# Allegro board PROIECT_TIE.brd
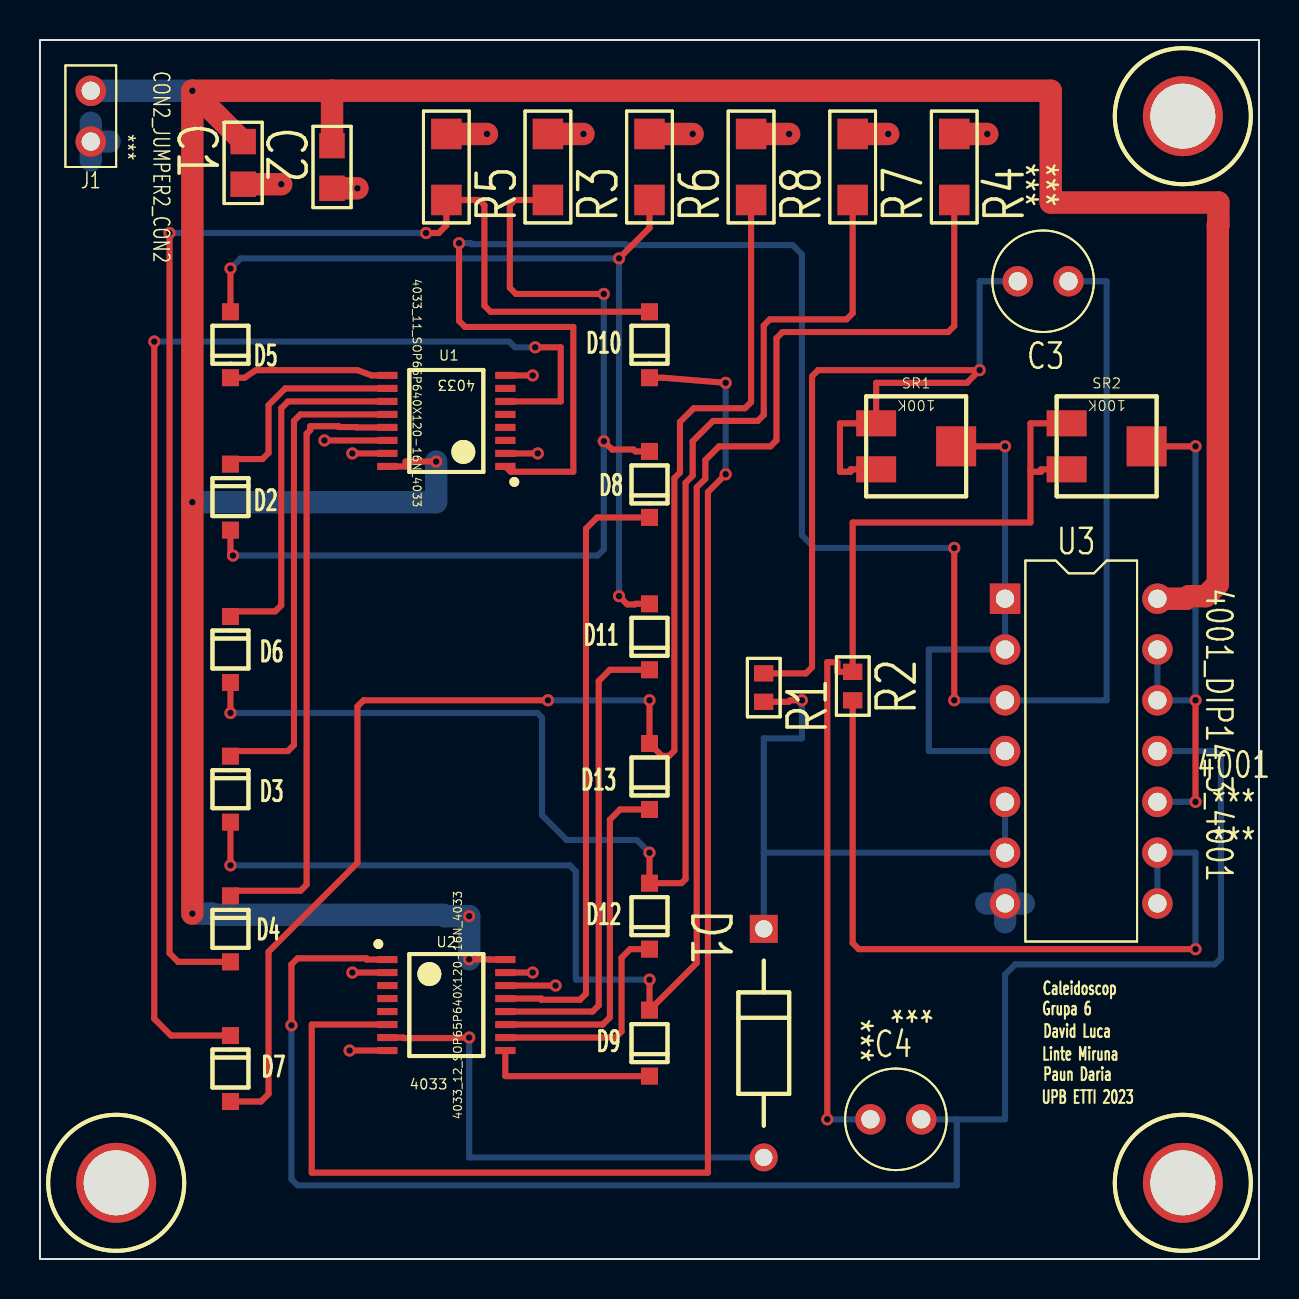
[diagram p0: board, top side]
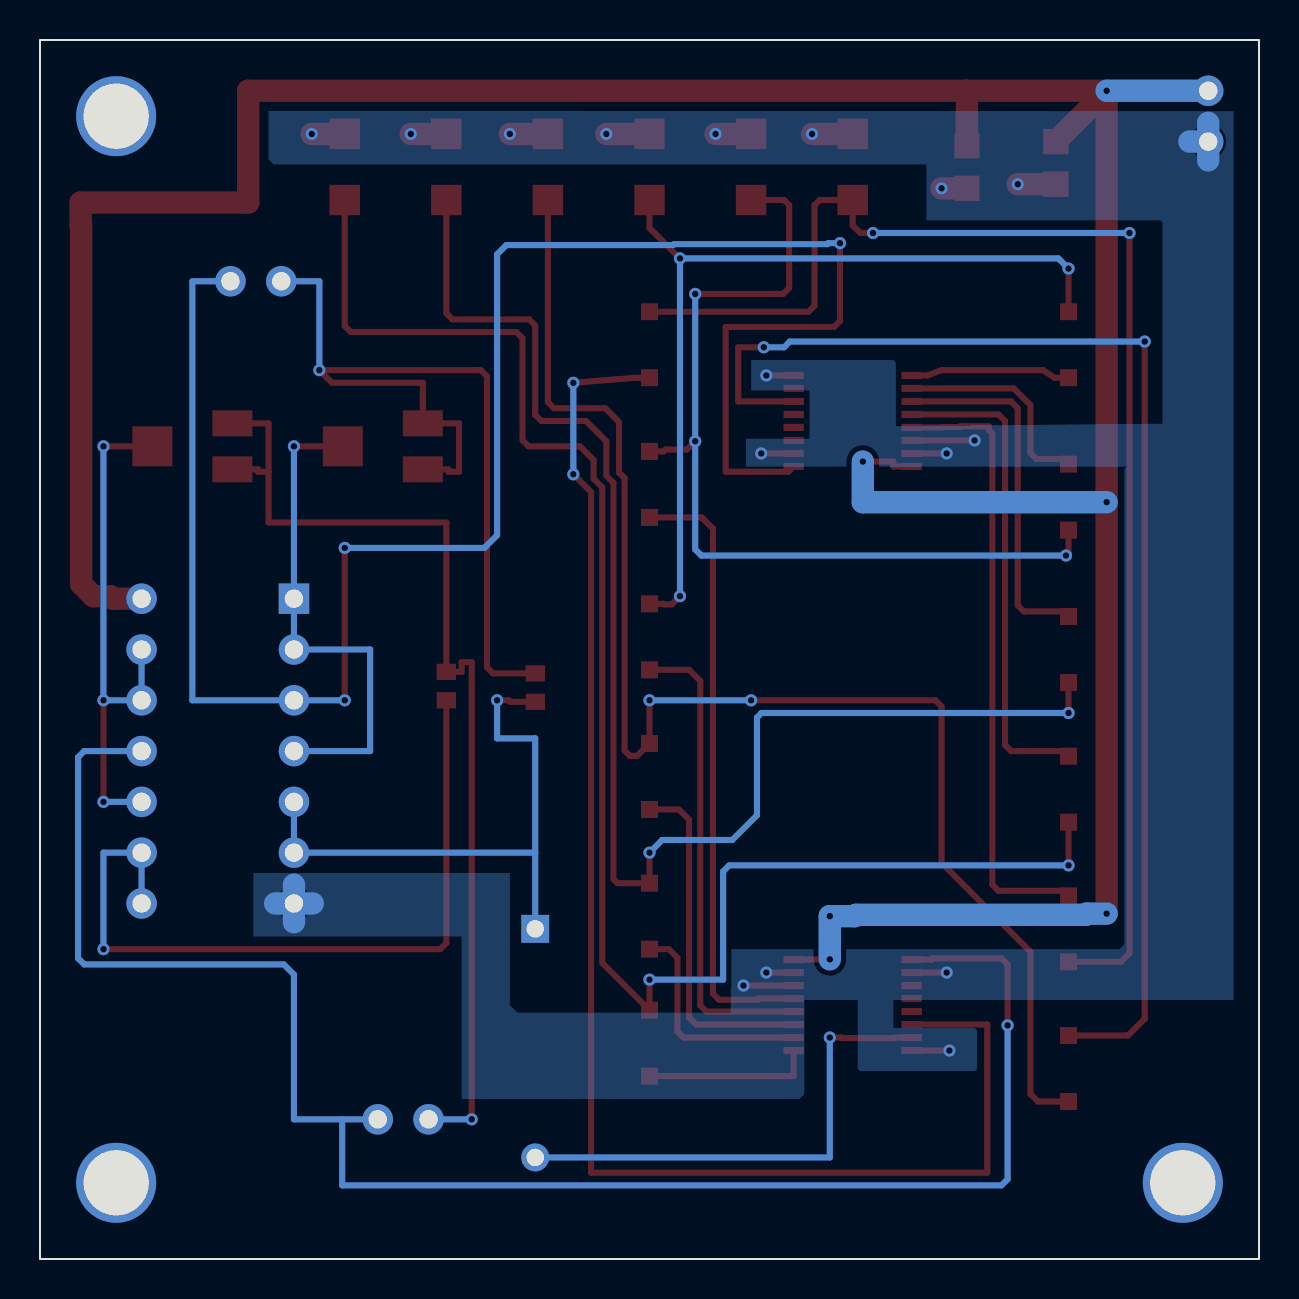
[diagram p1: board, bottom side, seen from below]

Outline 60.96 x 60.96 mm; copper layers: TOP, BOTTOM. Coordinates in mm from the lower left corner of the outline.
Outline path: rectangle 0,0 60.96,60.96

## Design rules (mm)
nets with their own width: min track width 0.305; nets N01018 N01147 N01271 N02659 N02668 N02718 N03305 N03321 N03325 N03329 N03609 N04193 N05010 N05022 N05963 N05969 N05975 N05981 N05987 N05999 N07239 N07243 N07258 N07262 N07266 N07270 N30968
nets with their own width: min track width 1.118; nets GND VDD

## Placement (name value [footprint] x y rotation side)
C1  4n7  [SMC0805]  10.16 55.88 270 top
C2  4n7  [SMC0805]  14.61 55.68 270 top
C3  1u  [CAP196]  48.9 48.9 270 top
C4  1u  [CAP196]  41.53 6.99 270 top
D1  D1N4148  [DAX2DO35]  36.2 5.08 270 top
D2  LED  [SOD123]  9.53 38.05 270 top
D3  LED  [SOD123]  9.53 23.44 270 top
D4  LED  [SOD123]  9.53 16.46 270 top
D5  LED  [SOD123]  9.53 45.77 90 top
D6  LED  [SOD123]  9.53 30.43 270 top
D7  LED  [SOD123]  9.53 9.47 270 top
D8  LED  [SOD123]  30.48 38.79 90 top
D9  LED  [SOD123]  30.48 10.85 90 top
D10  LED  [SOD123]  30.48 45.77 90 top
D11  LED  [SOD123]  30.48 31.17 90 top
D12  LED  [SOD123]  30.48 17.2 90 top
D13  LED  [SOD123]  30.48 24.18 90 top
J1  CON2  [JUMPER2]  2.54 58.42 270 top
NOREF  -  [unnamed]  3.81 3.81 0 top
NOREF#2  -  [unnamed]  57.15 57.15 0 top
NOREF#3  -  [#2]  0 0 90 top
NOREF#4  -  [#2]  0 0 0 top
NOREF#5  -  [unnamed]  57.15 3.81 0 top
R1  33K  [SMR0603]  36.19 27.86 90 top
R2  33K  [SMR0603]  40.64 27.94 90 top
R3  150  [SMR1206]  25.4 52.96 90 top
R4  150  [SMR1206]  45.72 52.96 90 top
R5  150  [SMR1206]  20.32 52.96 90 top
R6  150  [SMR1206]  30.48 52.96 90 top
R7  150  [SMR1206]  40.64 52.96 90 top
R8  150  [SMR1206]  35.56 52.96 90 top
SR1  100K  [TRIM_BI_23AM]  43.81 40.64 180 top
SR2  100K  [TRIM_BI_23AM]  53.34 40.64 180 top
U1  4033  [SOP65P640X120-16N]  20.32 41.91 180 top
U2  4033  [SOP65P640X120-16N]  20.32 12.7 0 top
U3  4001  [DIP14_3]  48.26 33.02 0 top

## Library data of the parts
C1 C2 = CAP NP
C3 C4 = CAP POL: Tolerance: ***; User Part Number: ***
D1 = D1N4148
D2-D13 = LED
J1 = CON2: User Part Number: ***
R1-R8 = R
SR1 SR2 = POT
U1 = 4033_11
U2 = 4033_12
U3 = 4001: Tolerance: ***; User Part Number: ***

## Footprints (pads in the part's own frame, mm; a bottom-side part is the same pattern mirrored in y, then rotated)
CAP196
  round 1.524 hole 0.914: 1(0,0) 2(0,2.54)
DAX2DO35
  round 1.397 hole 0.864: 1(0,0)
  rect 1.397x1.397 hole 0.864: 2(-11.43,0)
DIP14_3
  rect 1.524x1.524 hole 0.914: 1(0,0)
  round 1.524 hole 0.914: 2(0,-2.54) 3(0,-5.08) 4(0,-7.62) 5(0,-10.16) 6(0,-12.7) 7(0,-15.24) 8(7.62,-15.24) 9(7.62,-12.7) 10(7.62,-10.16) 11(7.62,-7.62) 12(7.62,-5.08) 13(7.62,-2.54) 14(7.62,0)
JUMPER2
  round 1.524 hole 0.914: 1(0,0) 2(2.54,0)
SMC0805
  rect 1.27x1.27 smd: 1(0,0) 2(2.134,0)
SMR0603
  rect 0.813x0.965 smd: 1(0,0) 2(1.422,0)
SMR1206
  rect 1.524x1.524 smd: 1(0,0) 2(3.302,0)
SOD123
  rect 0.85x0.85 smd: 1(-1.7,0) 2(1.6,0)
SOP65P640X120-16N
  rect 1.016x0.356 smd: 1(-2.95,2.275) 2(-2.95,1.625) 3(-2.95,0.975) 4(-2.95,0.325) 5(-2.95,-0.325) 6(-2.95,-0.975) 7(-2.95,-1.625) 8(-2.95,-2.275) 9(2.95,-2.275) 10(2.95,-1.625) 11(2.95,-0.975) 12(2.95,-0.325) 13(2.95,0.325) 14(2.95,0.975) 15(2.95,1.625) 16(2.95,2.275)
TRIM_BI_23AM
  rect 2x1.3 smd: 1(2,1.15) 2(2,-1.15)
  rect 2x2 smd: 3(-2,0)
unnamed
  round 4 hole 3.251 unplated: (0,0)

## Nets
GND: C1.2 C2.2 J1.2 R3.2 R4.2 R5.2 R6.2 R7.2 R8.2 U1.2 U1.8 U1.14 U1.15 U2.2 U2.8 U2.14 U2.15 U3.7
VDD: C1.1 C2.1 J1.1 U1.16(VDD) U2.16(VDD) U3.14
N01018: C3.2 U1.1 U3.3
N01147: C3.1 R1.2 SR1.1 SR1.2(WIPER)
N01271: D1.2 R1.1 U3.5 U3.6
N02659: R2.1 U3.8 U3.9
N02668: C4.1 R2.2 SR2.1 SR2.2(WIPER)
N02718: C4.2 U2.1 U3.11(OUT)
N03305: D2.1 U1.10
N03321: D4.1 U1.13
N03325: D7.1 U1.6
N03329: D8.1 U2.13
N03609: D6.1 U1.11
N04193: SR1.3 U3.1 U3.2 U3.4
N05010: D5.1 U1.9
N05022: D3.1 U1.12
N05963: D9.1 U2.9
N05969: D10.1 U2.6
N05975: D11.1 U2.12
N05981: D12.1 U2.10
N05987: D13.1 U2.11
N05999: D1.1 U2.7
N07239: D2.2(CATHODE) D8.2(CATHODE) R3.1
N07243: D3.2(CATHODE) D9.2(CATHODE) R4.1
N07258: D4.2(CATHODE) D10.2(CATHODE) R5.1
N07262: D5.2(CATHODE) D11.2(CATHODE) R6.1
N07266: D6.2(CATHODE) D12.2(CATHODE) R7.1
N07270: D7.2(CATHODE) D13.2(CATHODE) R8.1
N30968: SR2.3 U3.10 U3.12 U3.13

Pads without a net: U1 3 4 5 7; U2 3 4 5

## Via types
v1: diameter 0.61, hole 0.33, TOP to BOTTOM, 53 vias

## Routing (per net, layer and track width the routed paths; a pad name or vN(x,y) marks a point on that pad's centre or on a via; arc(x,y) is an arc through that point)
GND: length 36.5
  TOP w0.305: U1.2 v1(24.89,40.28) ; U2.8 v1(15.48,10.42) ; U1.8 v1(24.64,44.19) ; U2.14 v1(25.78,13.68) ; U1.15 v1(15.62,40.28) ; U2.2 v1(15.62,14.33) ; U1.14 v1(14.22,40.93) ; U2.15 v1(24.64,14.33)
  TOP w1.118: R6.2 v1(32.64,56.26) ; R7.2 v1(42.42,56.26) ; R8.2 v1(37.47,56.26) ; R3.2 v1(27.18,56.26) ; R5.2 v1(22.35,56.26) ; R4.2 v1(47.37,56.26) ; C2.2 v1(15.88,53.54) ; C1.2 v1(12.06,53.75)
  BOTTOM w1.118: 47.32,17.78 U3.7 ; U3.7 49.2,17.78 ; U3.7 48.26,16.84 ; U3.7 48.26,18.72 ; 2.54,54.94 J1.2 ; J1.2 3.48,55.88 ; J1.2 2.54,56.82
VDD: length 166.7
  TOP w0.305: U1.16 18.28,39.63 18.28,39.88 v1(19.81,39.88) ; U2.16 22.48,14.98 22.48,14.99 v1(21.46,14.99)
  TOP w1.118: v1(7.62,58.42) 14.61,58.42 ; v1(7.62,58.42) v1(7.62,37.85) v1(7.62,17.27) ; v1(7.62,58.42) C1.1 ; 14.61,58.42 50.55,58.42 50.55,52.83 58.93,52.83 58.93,51.71 58.9,51.71 58.9,33.76 58.29,33.15 57.45,33.15 57.33,33.02 U3.14 ; 14.61,58.42 C2.1
  BOTTOM w1.118: v1(21.46,14.99) v1(21.46,17.14) 20.22,17.14 20.15,17.21 8.67,17.21 8.61,17.27 v1(7.62,17.27) ; v1(19.81,39.88) 19.81,37.85 v1(7.62,37.85) ; J1.1 v1(7.62,58.42)
N01018: length 97.9
  TOP w0.305: v1(20.95,50.8) 20.95,46.91 21.26,46.61 26.67,46.61 26.67,39.37 23.53,39.37 U1.1 ; v1(45.72,27.94) v1(45.72,35.56)
  BOTTOM w0.305: v1(45.72,35.56) 38.73,35.56 38.1,36.2 38.1,50.24 37.64,50.71 29.29,50.71 29.25,50.75 21.59,50.75 21.54,50.8 v1(20.95,50.8) ; C3.2 53.34,48.9 53.34,27.94 U3.3 v1(45.72,27.94)
N01147: length 45.6
  TOP w0.305: R1.2 38.3,29.29 38.61,29.59 38.61,44.15 38.91,44.45 v1(46.99,44.45) 46.35,43.81 41.82,43.81 SR1.2 40.01,41.79 40.01,39.37 40.54,39.37 40.54,39.49 SR1.1
  BOTTOM w0.305: C3.1 46.99,48.9 v1(46.99,44.45)
N01271: length 29.9
  TOP w0.305: R1.1 37.44,27.86 37.52,27.94 v1(38.1,27.94)
  BOTTOM w0.305: D1.2 36.2,20.32 ; 36.2,20.32 36.2,26.04 38.1,26.04 v1(38.1,27.94) ; 36.2,20.32 U3.6 U3.5
N02659: length 38.7
  TOP w0.305: R2.1 40.64,15.8 40.94,15.49 v1(57.78,15.49)
  BOTTOM w0.305: v1(57.78,15.49) 57.78,20.32 U3.9 U3.8
N02668: length 51.8
  TOP w0.305: 49.53,39.37 49.53,41.79 SR2.2 ; 49.53,39.37 50.06,39.37 50.06,39.49 SR2.1 ; 49.53,39.37 49.53,36.83 40.64,36.83 R2.2 39.88,29.36 39.88,29.84 39.37,29.84 v1(39.37,6.99)
  BOTTOM w0.305: C4.1 v1(39.37,6.99)
N02718: length 88.4
  TOP w0.305: v1(12.57,11.68) 12.57,14.73 12.88,15.04 16.33,15.04 16.33,14.98 U2.1
  BOTTOM w0.305: 45.85,6.99 48.26,6.99 48.26,14.22 48.77,14.73 58.75,14.73 59.05,15.04 59.05,25.1 58.75,25.4 U3.11 ; 45.85,6.99 45.85,3.68 12.88,3.68 12.57,3.99 v1(12.57,11.68) ; 45.85,6.99 C4.2
N03305: length 10.8
  TOP w0.305: D2.1 9.78,40.01 11.13,40.01 11.43,40.31 11.43,42.7 12.26,43.54 U1.10
N03321: length 31
  TOP w0.305: U1.13 15.82,41.58 15.82,41.61 14.94,41.61 14.94,41.65 13.51,41.65 13.51,41.45 13.34,41.27 13.34,18.72 13.03,18.41 9.78,18.41 D4.1
N03325: length 64
  TOP w0.305: U1.6 26.04,42.89 26.04,45.59 v1(24.77,45.59) ; v1(5.71,45.88) 5.71,12.01 6.55,11.17 D7.1
  BOTTOM w0.305: v1(5.71,45.88) 23.46,45.88 23.75,45.59 v1(24.77,45.59)
N03329: length 30.9
  TOP w0.305: D8.1 27.86,37.09 27.3,36.53 27.3,13.27 27,12.96 25.07,12.96 25.07,13.03 U2.13
N03609: length 18.1
  TOP w0.305: U1.11 12.41,42.89 12.06,42.55 12.06,32.69 11.76,32.38 9.78,32.38 D6.1
N04193: length 25.3
  TOP w0.305: v1(48.26,40.64) SR1.3
  BOTTOM w0.305: v1(48.26,40.64) U3.1 U3.2 44.45,30.48 44.45,25.4 U3.4
N05010: length 8
  TOP w0.305: D5.1 10.23,44.07 10.79,44.45 15.88,44.45 16.58,44.19 U1.9
N05022: length 24.4
  TOP w0.305: U1.12 13.03,42.24 12.7,41.91 12.7,25.7 12.4,25.4 9.78,25.4 D3.1
N05963: length 8.5
  TOP w0.305: D9.1 23.27,9.15 U2.9
N05969: length 74.7
  TOP w0.305: D10.1 31.18,44.07 v1(34.29,43.81) ; U2.6 13.59,11.72 13.59,4.32 33.4,4.32 33.4,38.35 v1(34.29,39.24)
  BOTTOM w0.305: v1(34.29,43.81) v1(34.29,39.24)
N05975: length 23.8
  TOP w0.305: U2.12 27.64,12.37 27.94,12.68 27.94,28.91 28.5,29.47 D11.1
N05981: length 11.2
  TOP w0.305: D12.1 29.51,15.5 29.08,15.06 29.08,11.38 28.78,11.07 U2.10
N05987: length 17.5
  TOP w0.305: U2.11 28.14,11.72 28.5,12.08 28.5,21.97 29.01,22.48 D13.1
N05999: length 24.8
  TOP w0.305: U2.7 18.16,11.07 18.18,11.05 20.85,11.05 20.88,11.07 v1(21.46,11.07)
  BOTTOM w0.305: v1(21.46,11.07) 21.46,5.08 D1.1
N07239: length 46.2
  TOP w0.305: v1(28.19,40.89) 28.61,40.48 29.68,40.48 29.78,40.38 D8.2 ; v1(9.65,35.18) 9.53,35.31 D2.2 ; v1(28.19,48.26) 23.8,48.26 23.5,48.56 23.5,52.7 23.75,52.96 R3.1
  BOTTOM w0.305: v1(28.19,48.26) v1(28.19,40.89) 28.19,35.48 27.89,35.18 v1(9.65,35.18)
N07243: length 83.4
  TOP w0.305: D3.2 v1(9.53,19.68) ; v1(30.48,13.97) D9.2 32.84,14.81 32.84,38.59 33.27,39.02 33.27,39.95 33.96,40.64 36.53,40.64 36.83,40.94 36.83,46.05 37.13,46.35 45.42,46.35 45.72,46.66 R4.1
  BOTTOM w0.305: v1(30.48,13.97) 26.8,13.97 26.8,19.38 26.49,19.68 v1(9.53,19.68)
N07258: length 69.9
  TOP w0.305: v1(6.48,51.31) 6.48,15.29 6.91,14.86 D4.2 ; v1(19.3,51.31) 19.94,51.31 20.32,51.69 R5.1 21.97,52.96 22.23,52.7 22.23,47.67 22.53,47.37 D10.2
  BOTTOM w0.305: v1(6.48,51.31) v1(19.3,51.31)
N07262: length 44
  TOP w0.305: v1(28.96,33.15) 29.37,32.73 29.74,32.73 29.78,32.76 D11.2 ; R6.1 30.48,51.56 v1(28.96,50.04) ; v1(9.53,49.53) D5.2
  BOTTOM w0.305: v1(28.96,33.15) v1(28.96,50.04) 10.03,50.04 v1(9.53,49.53)
N07266: length 72.6
  TOP w0.305: v1(30.48,20.32) D12.2 32.08,18.79 32.28,19 32.28,38.82 32.64,39.17 32.64,40.89 33.66,41.91 35.89,41.91 36.2,42.21 36.2,46.69 36.5,46.99 40.34,46.99 40.64,47.29 R7.1 ; D6.2 v1(9.53,27.3)
  BOTTOM w0.305: v1(30.48,20.32) 29.84,20.95 26.34,20.95 25.11,22.19 25.11,27.08 24.88,27.3 v1(9.53,27.3)
N07270: length 72.4
  TOP w0.305: R8.1 35.56,42.85 35.26,42.55 32.69,42.55 32,41.86 32,39.33 31.72,39.05 31.72,25.43 31.46,25.16 31.1,25.16 D13.2 v1(30.48,27.94) ; D7.2 11.05,7.88 11.43,8.26 11.43,15.37 15.88,19.81 15.88,27.64 16.18,27.94 v1(25.4,27.94)
  BOTTOM w0.305: v1(25.4,27.94) v1(30.48,27.94)
N30968: length 26.6
  TOP w0.305: v1(57.78,27.94) v1(57.78,22.86) ; v1(57.78,40.64) SR2.3
  BOTTOM w0.305: U3.13 U3.12 v1(57.78,27.94) v1(57.78,40.64) ; v1(57.78,22.86) U3.10

## Copper pours and planes (outline as drawn; the poured copper is in the pictures)
GND on BOTTOM: 22.99,8 22.73,8.26 22.73,12.95 20.07,12.95 20.07,9.53 19.94,9.4 14.22,9.4 14.1,9.53 14.1,11.43 14.22,11.56 18.29,11.56 18.29,12.95 1.27,12.95 1.27,39.88 1.27,57.4 49.53,57.42 49.53,54.99 49.28,54.74 16.64,54.74 16.64,51.94 4.92,51.94 4.83,51.82 4.83,41.77 18.16,41.65 18.16,44.83 18.29,44.96 25.4,44.96 25.4,43.43 22.48,43.43 22.48,41.02 25.65,41.02 25.65,39.62 6.6,39.62 6.73,39.5 6.73,15.75 6.99,15.49 26.42,15.49 26.42,12.32 37.08,12.32 37.47,12.7 37.47,19.3 50.29,19.3 50.29,16.13 39.88,16.13 39.88,8

## Text on the board
Ref Des/Silkscreen Top: UPB ETTI 2023 | Grupa 6 | Linte Miruna | Caleidoscop | David Luca | Paun Daria
XSECTION_CHART: *  SURFACE - AIR 0 MIL(+0/-0) | L1 TOP CONDUCTOR - COPPER 1.2 MIL(+0/-0) | *  DIELECTRIC - FR-4 8 MIL(+0/-0) | L2 BOTTOM CONDUCTOR - COPPER 1.2 MIL(+0/-0) | DESIGN CROSS SECTION CHART | ___________________________ | TOTAL THICKNESS 10.4 MIL | 1-2
DIMENSION: FIGURE | FINISHED_SIZE | 13.0 | 34.0 | 36.0 | 128.0 | DRILL CHART: TOP to BOTTOM | ALL UNITS ARE IN MILS | PLATED | NON-PLATED | QTY | 54 | 2 | 20 | 3
